# EAGLE board hv_ct_sensor6 (EAGLE 7.6.0)
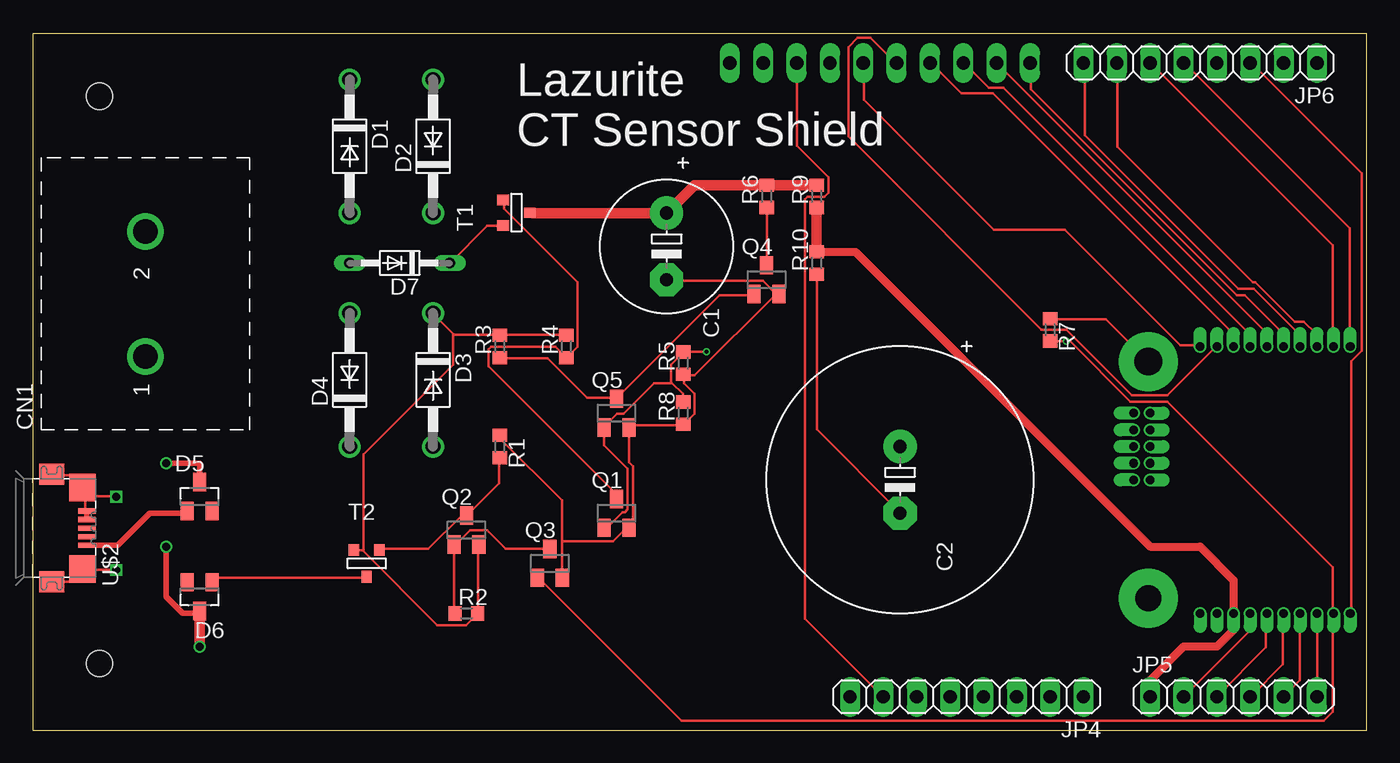
[diagram p0: board, top side]
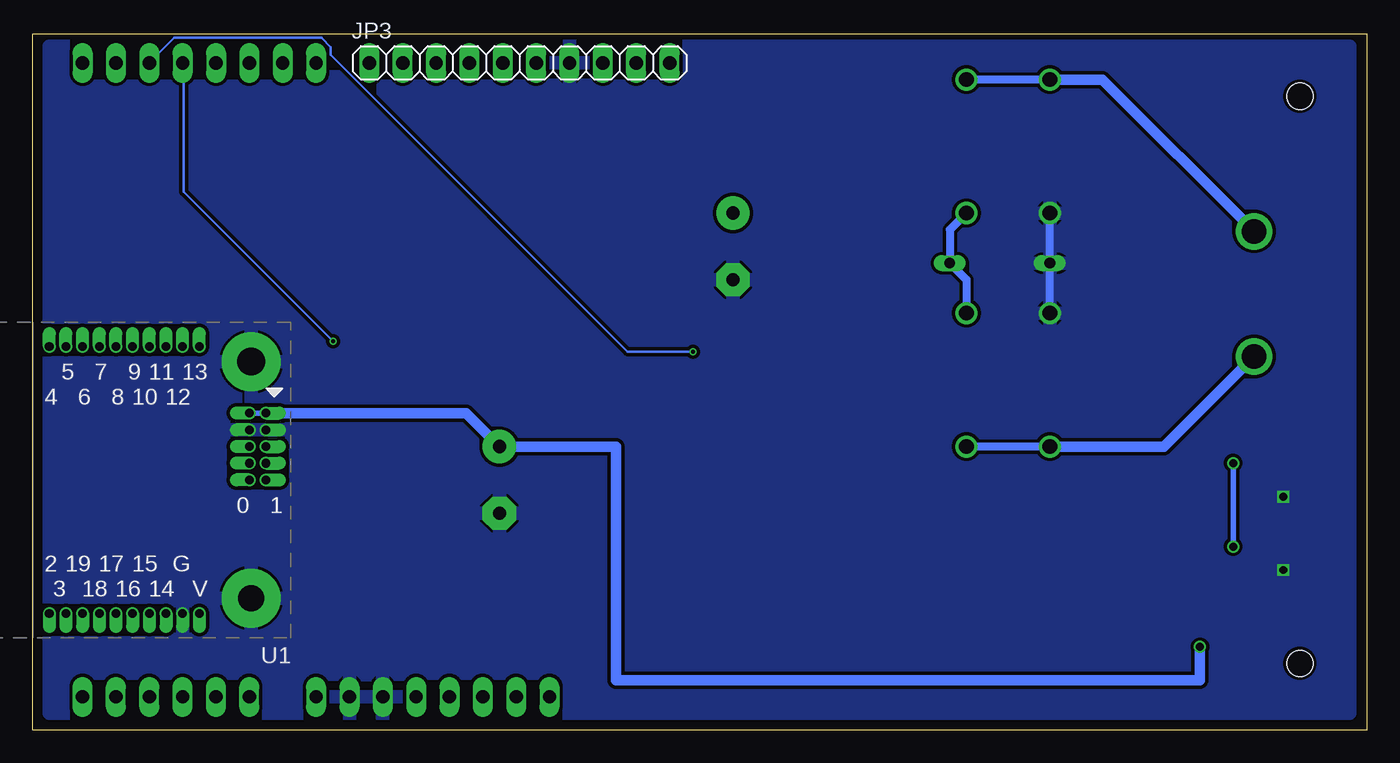
[diagram p1: board, bottom side, seen from below]

Size 101.58 x 53.01 mm. Coordinates in mm from the lower left corner, seen from the top.
Outline: 0,0 101.58,0 101.58,53.01 0,53.01 0,0
Copper layers (1*16): Top 0.018mm / dielectric 1.55mm / Bottom 0.018mm
Design rules "eC_2Layer_PClass6_BaseCopperO18_eCDefault *": minimum track width 0.2mm, minimum drill 0.3mm, track to track 0.2mm, track to pad 0.2mm, pad to pad 0.2mm, via to via 0.2mm, smd to smd 0mil, copper to edge 0.2mm, drill to drill 0.3mm, minimum pad ring 0.175mm, minimum via ring 0.125mm, stop-mask expansion 0mil, vias tented up to drill 0.45mm, thermal gap 0.2mm
Net classes: 1 GND: width 0.813 mm, drill 0.406 mm
Holes 2 mm at 5.08,5.08 5.08,48.26

## Footprints (pad centres in the part's own frame; a part is rotated, then mirrored left to right if it is on the bottom)
E5-10,5 = drill 1.016 pad 2.54: + -2.54,0 | drill 1.016 pad 2.54 octagon: - 2.54,0
E5-20 = drill 1.016 pad 2.54: + -2.54,0 | drill 1.016 pad 2.54 octagon: - 2.54,0
2PIN = drill 1.854: 1 5.588,7.938; 2 15.113,7.938
DO41-10 = drill 1.118: A 5.08,0; C -5.08,0
SOT23 = smd 1 x 1.4: 1 -0.95,-1.1; 2 0.95,-1.1; 3 0,1.1
DO34-7 = drill 0.813 long: A 3.81,0; C -3.81,0
1X10 = drill 1.016 long: 1 -11.43,0; 2 -8.89,0; 3 -6.35,0; 4 -3.81,0; 5 -1.27,0; 6 1.27,0; 7 3.81,0; 8 6.35,0; 9 8.89,0; 10 11.43,0
1X08 = drill 1.016 long: 1 -8.89,0; 2 -6.35,0; 3 -3.81,0; 4 -1.27,0; 5 1.27,0; 6 3.81,0; 7 6.35,0; 8 8.89,0
1X06 = drill 1.016 long: 1 -6.35,0; 2 -3.81,0; 3 -1.27,0; 4 1.27,0; 5 3.81,0; 6 6.35,0
R0603 = smd 1 x 1.1: 1 -0.85,0; 2 0.85,0
SOT-23 = smd 0.787 x 0.889: 1 0.025,-1.016; 2 -0.94,1.016; 3 0.991,1.016
LAZURITE920J = drill 0.65 pad 0.8 offset: 0 1.27,5.08; 1 0,5.08; 2 16.51,15.24; 3 15.24,15.24; 4 16.51,-5.08; 5 15.24,-5.08; 6 13.97,-5.08; 7 12.7,-5.08; 8 11.43,-5.08; 9 10.16,-5.08; 10 8.89,-5.08; 11 7.62,-5.08; 12 6.35,-5.08; 13 5.08,-5.08; 14 7.62,15.24; 15 8.89,15.24; 16 10.16,15.24; 17 11.43,15.24; 18 12.7,15.24; 19 13.97,15.24; GND_0 0,1.27; GND_1 1.27,1.27; GND_2 6.35,15.24; TEST0 1.27,3.81; TEST1N 0,3.81; VCC3V_0 0,2.54; VCC3V_1 1.27,2.54; VCC3V_2 5.08,15.24; VCC5V_0 0,0; VCC5V_1 1.27,0 | drill 2.1 pad 4.5: PAD_0 1.135,-3.92 | drill 2 pad 4.5: PAD_1 1.135,14.08
ZX62R-B-5P = smd 1.35 x 0.4: 1 2.675,-1.3; 2 2.675,-0.65; 3 2.675,0; 4 2.675,0.65; 5 2.675,1.3 | smd 1.9 x 1.6: M1 0,-4.1; M2 0,4.1 | smd 2 x 2.1: M3 2.35,3.1; M4 2.35,-3.1

## Placement (x,y rotation side)
C1  470uF  [E5-10,5]  48.26,36.83 270 top
C2  1F  [E5-20]  66.04,19.05 270 top
CN1  NC6-P108-02  [2PIN]  16.51,22.86 90 top
D1  1N4001  [DO41-10]  24.13,44.45 270 top
D2  1N4001  [DO41-10]  30.48,44.45 90 top
D3  1N4001  [DO41-10]  30.48,26.67 270 top
D4  1N4001  [DO41-10]  24.13,26.67 90 top
D5  BAS40  [SOT23]  12.7,17.78 0 top
D6  BAS40  [SOT23]  12.7,10.16 180 top
D7  GDZJ5.1A  [DO34-7]  27.94,35.56 180 top
JP3  FH150-1x10SG  [1X10]  64.52,50.8 0 bottom
JP4  FH150-1x8SG  [1X08]  71.12,2.54 180 top
JP5  FH150-1x6SG  [1X06]  91.44,2.54 0 top
JP6  FH150-1x8SG  [1X08]  88.9,50.8 180 top
Q1  BSS138  [SOT23]  44.45,16.51 0 top
Q2  BSS84  [SOT23]  33.02,15.24 0 top
Q3  BSS138  [SOT23]  39.37,12.7 0 top
Q4  BSS138  [SOT23]  55.88,34.29 0 top
Q5  BSS138  [SOT23]  44.45,24.13 0 top
R1  500k  [R0603]  35.56,21.59 270 top
R2  500k  [R0603]  33.02,8.89 0 top
R3  500k  [R0603]  35.56,29.21 90 top
R4  500k  [R0603]  40.64,29.21 90 top
R5  500k  [R0603]  49.53,27.94 90 top
R6  1k  [R0603]  55.88,40.64 90 top
R7  500k  [R0603]  77.47,30.48 270 top
R8  500k  [R0603]  49.53,24.13 90 top
R9  500k  [R0603]  59.69,40.64 90 top
R10  500k  [R0603]  59.69,35.56 90 top
T1  IRLML2246  [SOT-23]  36.83,39.37 90 top
T2  IRLML2246  [SOT-23]  25.4,12.7 0 top
U1  FSS-71034-10x2,FSS-72034-05x1  [LAZURITE920J]  83.82,24.13 180 bottom
U$2  ZX62R-B-5P  [ZX62R-B-5P]  1.44,15.38 0 top

## Library data of the parts
C1 C2 = rcl
CN1 = lz-shield
D1-D7 = diode
JP3-JP6 = pinhead
Q1-Q5 = transistor-small-signal
R1-R10 = resistor
T1 T2 = zetex; OC_FARNELL: unknown; OC_NEWARK: unknown
U1 = lazurite
U$2 = con-hirose

## Nets
2: JP6.3 Q1.1 Q5.1 R5.2 R8.2 U1.2
3: JP6.4 Q3.1 R7.2 U1.3
4: JP6.5 U1.4
5: JP6.6 U1.5
6: JP6.7 U1.6
7: JP6.8 U1.7
8: JP3.1 U1.8
9: JP3.2 U1.9
10: JP3.3 U1.10
11: JP3.4 U1.11
12: JP3.5 U1.12
13: JP3.6 U1.13
A0: JP5.1 R9.1 R10.2 U1.14
A1: JP5.2 U1.15
A2: JP5.3 U1.16
A3: JP5.4 U1.17
A4: JP5.5 U1.18
A5: JP5.6 U1.19
GND: C1.- C2.- D1.A D4.A D7.A JP3.7 JP4.2 JP4.3 Q1.2 Q3.2 Q4.2 Q5.2 R1.1 R5.1 R7.1 R8.1 R10.1 U1.GND_0 U1.GND_1 U1.GND_2 U1.PAD_0 U1.PAD_1 U$2.4 U$2.5 U$2.M1 U$2.M2 U$2.M3 U$2.M4
I+: CN1.2 D1.C D2.A
I-: CN1.1 D3.A D4.C
IOREF: JP3.8 JP4.7
IOUT: D2.C D3.C D7.C Q2.2 R2.2 R3.2 R4.2 T1.2 T2.2
IOUT2: D6.1 T2.1
N$1: Q2.3 R1.2 T2.3
N$5: Q2.1 Q3.3 R2.1
N$7: Q1.3 R4.1 T1.3
N$9: Q4.3 R6.1
N$10: C1.+ R6.2 R9.2 T1.1
N$11: Q4.1 Q5.3 R3.1
NC: JP4.8
NC(VCC5V): JP4.4
RESET: JP4.6
SCL: JP3.10
SDA: JP3.9
TEST0: U1.TEST0
TEST1N: U1.TEST1N
VCC3V: JP4.5
VCC5V: C2.+ D5.3 D6.3 U1.VCC5V_0 U1.VCC5V_1
VEXT: D5.1 U$2.1
VIN: JP4.1

## Tracks (layer width: path | path; a pad name or v marks a point on that pad's centre or on a via)
2  (via drill 0.3)
  Top 0.2: 48.65,26.45 48.6,26.5 48.6,27.8 49.5,28.7 R5.2 49.6,28.8 v51.3,28.8 | 48.65,26.45 49.5,25.6 49.5,25 R8.2 | Q1.1 43.5,15.5 43.8,15.5 44.9,16.6 45.1,16.6 45.3,16.8 45.3,19.9 43.5,21.7 Q5.1 43.5,23.1 44.5,24.1 45,24.1 47.3,26.4 48.6,26.4 48.65,26.45 | U1.2 100.4,8.9 100.4,28.1 101.2,28.9 101.2,42.4 92.8,50.8 JP6.3
  Bottom 0.2: v51.3,28.8 56.3,28.8 78.9,51.4 78.9,52 79.6,52.7 90.8,52.7 JP6.3
3  (via drill 0.3)
  Top 0.2: R7.2 77.5,29.6 v78.7,29.6 79,29.6 83.6,25 86.4,25 99,12.4 99,8.9 U1.3 99,8.8 99,1.4 98.3,0.7 49.4,0.7 38.5,11.6 Q3.1
  Bottom 0.2: v78.7,29.6 90.1,41 90.1,50.8 JP6.4
4
  Top 0.2: U1.4 100.3,29.3 100.3,38.2 87.7,50.8 JP6.5
5
  Top 0.2: U1.5 99,29.3 99,36.9 JP6.6
6
  Top 0.2: U1.6 97.7,29.3 97.7,30.2 96.8,31.1 96.1,31.1 93.1,34.1 92.9,34.1 82.6,44.4 82.6,50.8 JP6.7
7
  Top 0.2: U1.7 96.5,29.3 96.5,30.1 93,33.6 91.8,33.6 80.1,45.3 80.1,50.8 JP6.8
8
  Top 0.2: U1.8 95.2,29.3 95.2,30.2 92.3,33.1 91.7,33.1 76,48.8 76,50.8 JP3.1
9
  Top 0.2: U1.9 93.9,29.3 93.9,30.3 JP3.2
10
  Top 0.2: U1.10 92.7,29.3 92.7,30.1 73.9,48.9 72.8,48.9 70.9,50.8 JP3.3
11
  Top 0.2: U1.11 91.4,29.3 91.4,30.2 73.1,48.5 70.7,48.5 68.4,50.8 JP3.4
12
  Top 0.2: U1.12 90.1,29.2 86.4,25.5 83.7,25.5 78.7,30.5 76.8,30.5 62.1,45.2 62.1,52 62.8,52.7 63.8,52.7 65.7,50.8 JP3.5
13
  Top 0.2: U1.13 88.9,29.3 87.4,29.3 78.6,38.1 73.2,38.1 63.3,48 63.3,50.8 JP3.6
A0
  Top 0.61: R10.2 62.65,36.41 85.09,13.97 88.9,13.97 91.44,11.43 U1.14 91.44,7.62 90.17,6.35 87.63,6.35 85.09,3.81 JP5.1
  Top 0.813: R9.1 R10.2
A1
  Top 0.2: U1.15 92.7,8.8 92.7,7.6 87.7,2.6 JP5.2
A2
  Top 0.2: U1.16 93.9,8.8 93.9,6.3 90.2,2.6 JP5.3
A3
  Top 0.2: U1.17 95.2,8.8 95.2,5 92.8,2.6 JP5.4
A4
  Top 0.2: U1.18 96.5,8.8 96.5,3.8 95.3,2.6 JP5.5
A5
  Top 0.2: U1.19 97.8,8.8 97.8,2.6 JP5.6
GND  (via drill 0.6)
  Top 0.2: 40.3,14.4 40.3,11.6 Q3.2 | 40.3,14.4 40.3,17.5 35.6,22.2 35.6,22.4 R1.1 | 40.3,14.4 44.2,14.4 45.2,15.4 Q1.2 45.4,15.5 45.7,15.8 45.7,20.1 45.4,20.4 Q5.2 45.4,23.1 45.5,23.2 49.5,23.2 R8.1 49.6,23.3 50.4,24.1 50.4,25.6 49.6,26.4 49.6,27 R5.1 49.7,27 50.4,27 56.6,33.2 | 4.1,16.7 U$2.5 4,16.8 4,17.8 | R10.1 59.7,22.9 66,16.6 C2.- | R7.1 77.5,31.3 81.7,31.3 84.9,28.1 U1.PAD_0 | 56.6,33.2 56.8,33.2 Q4.2 56.6,33.2 | 56.6,33.2 55.6,34.2 48.3,34.2 C1.- | U$2.M1 1.5,11.3 2.8,11.3 3.7,12.2 U$2.M4 3.8,12.2 6.3,12.2 v6.35,12.19 | 4,17.8 4,18.2 3.8,18.4 U$2.M3 | U$2.M2 1.5,19.4 2.8,19.4 3.7,18.5 U$2.M3 | 4,17.8 6.3,17.8 v6.35,17.78 | 4,17.8 U$2.M3
  Top 0.406: U$2.5 U$2.4
  Bottom 0.61: D4.A D7.A D1.A
  pour Bottom (isolate 0.254): 1.27,52.07 100.33,52.07 100.33,1.27 1.27,1.27
I+
  Bottom 0.61: D1.C D2.A
  Bottom 0.813: CN1.2 20.13,49.53 D1.C
I-
  Bottom 0.61: D4.C D3.A
  Bottom 0.813: CN1.1 15.43,21.59 D4.C
IOREF
  Top 0.2: JP3.8 58.2,50.8 58.2,44.5 60.6,42.1 60.6,40.9 60.3,40.6 59,40.6 58.8,40.4 58.8,8.5 64.7,2.6 JP4.7
IOUT
  Top 0.2: 25.15,13.65 30.8,8 33,8 33.8,8.8 R2.2 33.9,8.9 33.9,14.1 Q2.2 | 25.15,13.65 25.1,13.7 24.5,13.7 T2.2 | R4.2 40.6,30.1 35.6,30.1 R3.2 35.5,30.1 32.1,30.1 32.05,30.15 | T1.2 35.8,38.4 34.6,38.4 31.8,35.6 D7.C | 32.05,30.15 30.5,31.7 D3.C | 25.15,13.65 25.2,13.7 25.2,21 32,27.8 32,30.1 32.05,30.15
  Bottom 0.61: D2.C 31.75,38.1 D7.C 30.48,34.29 D3.C
IOUT2
  Top 0.2: T2.1 25.4,11.6 14,11.6 13.7,11.3 D6.1
N$1
  Top 0.2: T2.3 26.4,13.8 30.1,13.8 32.6,16.3 33,16.3 Q2.3 33.1,16.4 35.5,18.8 35.5,20.7 R1.2
N$5
  Top 0.2: R2.1 32.1,8.9 32.1,14.1 Q2.1 32.2,14.1 33.3,15.2 34.6,15.2 36,13.8 Q3.3
N$7
  Top 0.2: T1.3 35.9,40.3 35.9,39.7 41.5,34.1 41.5,29.2 40.7,28.4 R4.1 39.8,29.2 34.9,29.2 34.7,29 34.7,27.7 44.4,18 44.4,17.7 Q1.3
N$9
  Top 0.2: R6.1 55.9,39.7 55.9,35.4 Q4.3
N$10
  Top 0.813: T1.1 38.1,39.37 C1.+ 50.38,41.49 R6.2 R9.2
N$11
  Top 0.2: R3.1 35.6,28.3 39.2,28.3 42.2,25.3 44.4,25.3 Q5.3 44.5,25.3 52.3,33.1 54.9,33.1 Q4.1
VCC5V  (via drill 0.6)
  Top 0.406: D5.3 12.7,20.32 v10.16,20.32 | v10.16,13.97 10.16,10.16 11.43,8.89 12.7,8.89
  Top 0.813: v12.7,6.35 12.7,8.89 D6.3
  Bottom 0.406: U1.VCC5V_0 U1.VCC5V_1 | v10.16,20.32 v10.16,13.97
  Bottom 0.813: v12.7,6.35 12.7,3.81 57.15,3.81 57.15,21.59 C2.+ 68.58,24.13 U1.VCC5V_0
VEXT
  Top 0.406: U$2.1 6.46,14.08 8.89,16.51 11.58,16.51 D5.1

## Text on the board
tPlace: Lazurite / CT Sensor Shield